# Altium PCB PCB_Break.pcbdoc
Units mil, origin at the board's own origin, x right, y up, seen from the top; angles counter-clockwise.
Board outline 1150 x 1023.62 mil, 2 copper layers (Top Layer, Bottom Layer); 20 components, 20 nets, 67 pads, 4 vias.
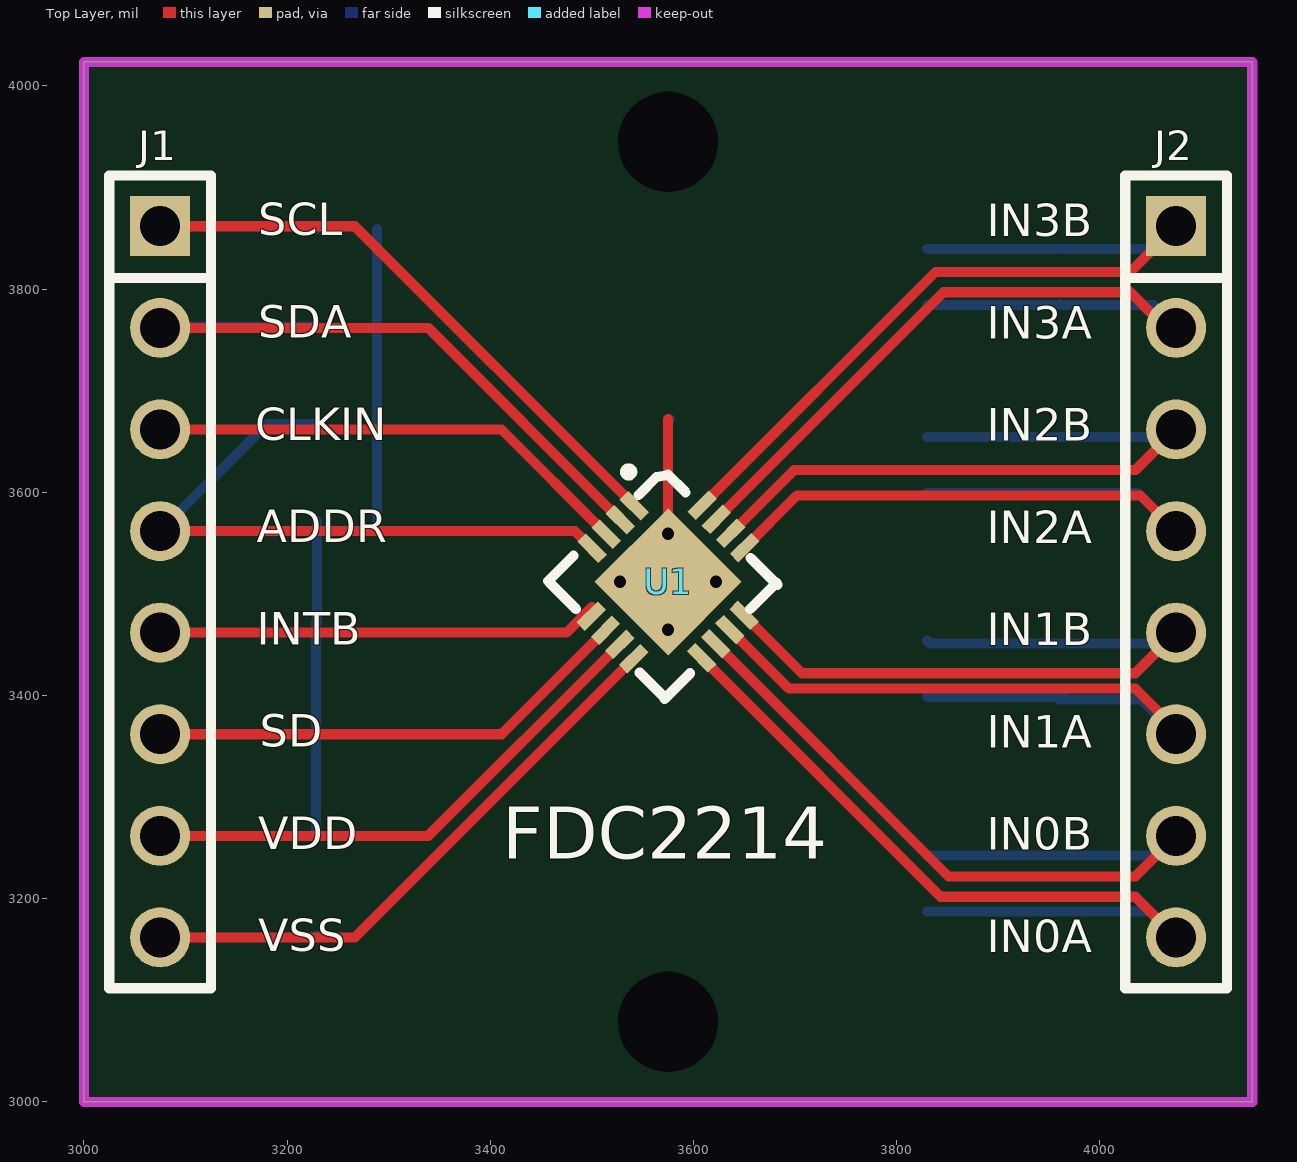
[diagram p0: Top Layer view]
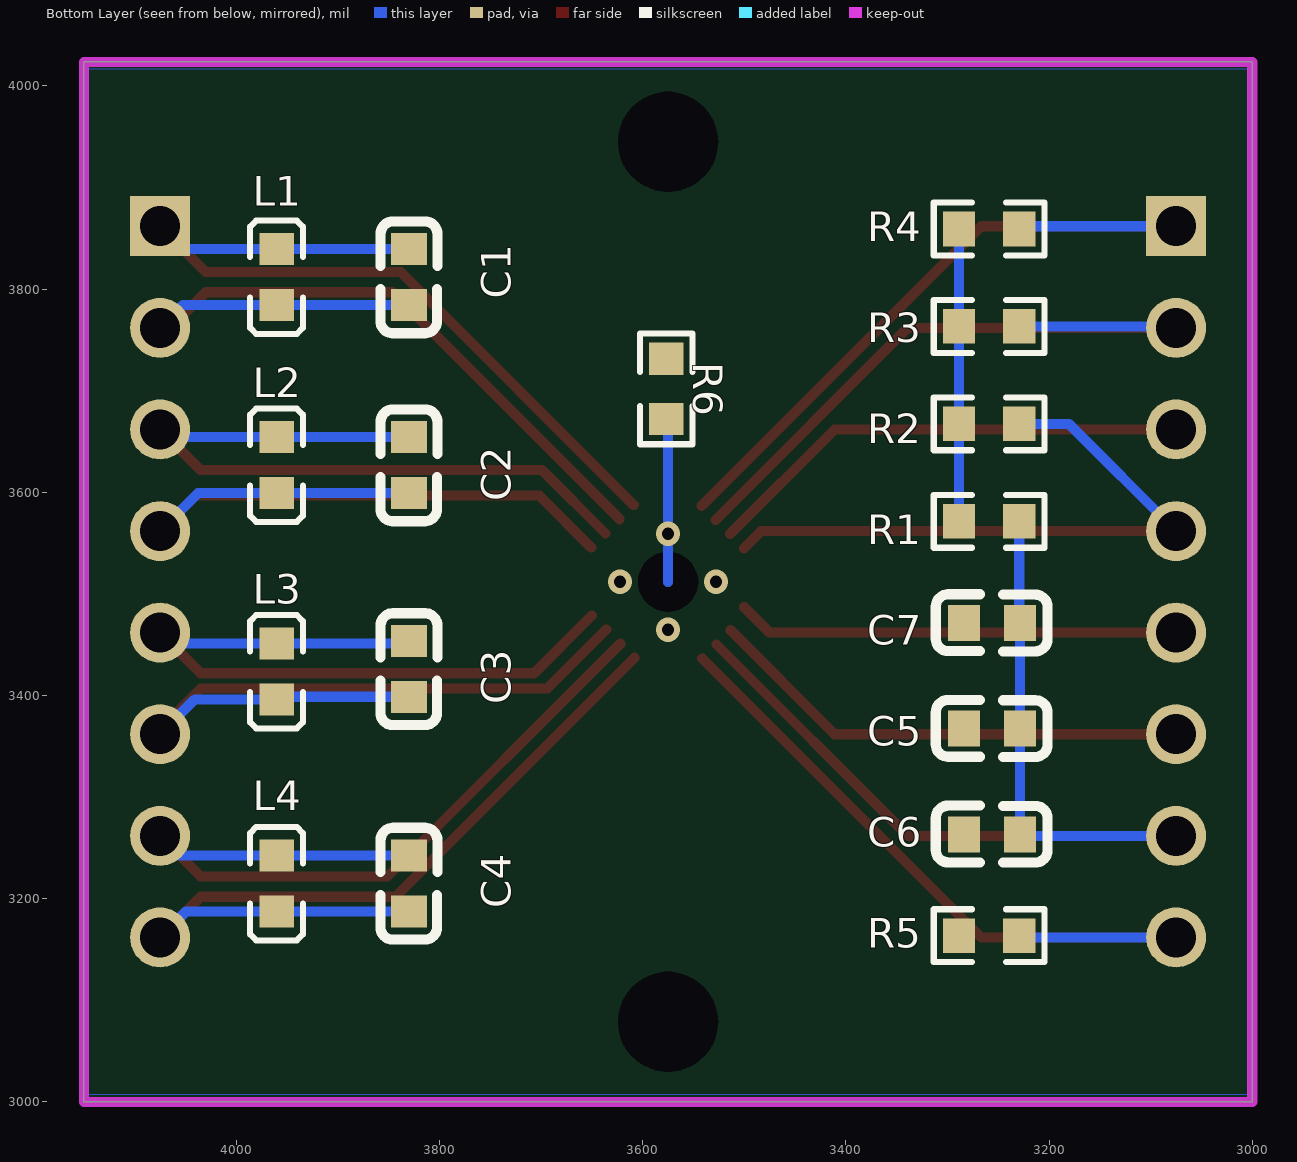
[diagram p1: Bottom Layer view, seen from below]

## Layer stack, top to bottom
Top Layer: signal copper (thickness not stored)
Dielectric: dielectric 12.6, FR-4, Dk 4.8
Bottom Layer: signal copper (thickness not stored)

## Board outline
3000,3000 4150,3000 4150,4023.62 3000,4023.62
cut-out: 3624.21,3944.88 ccw(c3575,3944.88) 3525.79,3944.88 ccw(c3575,3944.88)
cut-out: 3624.21,3078.74 ccw(c3575,3078.74) 3525.79,3078.74 ccw(c3575,3078.74)
cut-out: 3604.53,3511.81 ccw(c3575,3511.81) 3545.47,3511.81 ccw(c3575,3511.81)

## Components (designator, comment, footprint, x,y, rotation, side; value= is the part's Value field where it differs from the comment)
C1 "0603CG330J500NT" C0603 3830,3811.81 r90 bottom
C2 "0603CG330J500NT" C0603 3830,3626.81 r90 bottom
C3 "0603CG330J500NT" C0603 3830,3426.22 r90 bottom
C4 "0603CG330J500NT" C0603 3830,3215.03 r90 bottom
C5 "CL10A105KB8NNNC" C0603 3256.19,3263.38 r180 bottom
C6 "CC0603KRX7R9BB104" C0603 3256.19,3367.37 r180 bottom
C7 "0603B103K500NT" C0603 3256.19,3471.37 r180 bottom
J1 "PZ254V-11-08P" HDR-TH_8P-P2.54-V-M 3075,3511.81 r270 top
J2 "PZ254V-11-08P" HDR-TH_8P-P2.54-V-M 4075,3511.81 r270 top
L1 "SDFL1608T180KTF" L0603 3960,3811.81 r90 bottom
L2 "SDFL1608T180KTF" L0603 3960,3626.81 r90 bottom
L3 "SDFL1608T180KTF" L0603 3960,3423.66 r90 bottom
L4 "SDFL1608T180KTF" L0603 3960,3215.03 r90 bottom
R1 "RC0603FR-070RL" R0603 3258.99,3571.42 r0 bottom
R2 "0603WAF4701T5E" R0603 3258.99,3667.31 r0 bottom
R3 "0603WAF4701T5E" R0603 3258.99,3763.2 r0 bottom
R4 "0603WAF4701T5E" R0603 3258.99,3859.09 r0 bottom
R5 "RC0603FR-070RL" R0603 3258.99,3163.54 r180 bottom
R6 "RC0603FR-070RL" R0603 3576.78,3701.79 r90 bottom
U1 "FDC2214RGHT" WQFN-16_L4.1-W4.1-P0.50-LS4.1-BL 3575,3511.81 r225 top

## Footprints (in the part's own frame and the unit in brackets; to place one, negate y for a bottom-side part, rotate by r counter-clockwise, add the part's x,y. Pads: shape width x height; smd on the part's side, far side on the other; paste and mask are expansions set on the pad)
C0603 [mm]
  rect 0.8x0.9 smd paste+0 mask+0.051: 1(-0.7,0) 2(0.7,0)
  silkscreen extent -1.41,-0.71 1.39,0.72
HDR-TH_8P-P2.54-V-M [mm]
  rect 1.5x1.5 hole 1 paste+0 mask+0.051: 1(-8.89,0)
  round 1.5 hole 1 paste+0 mask+0.051: 2(-6.35,0) 3(-3.81,0) 4(-1.27,0) 5(1.27,0) 6(3.81,0) 7(6.35,0) 8(8.89,0)
  silkscreen extent -10.16,-1.27 10.16,1.27
L0603 [mm]
  rect 0.8x0.864 smd paste-100 mask+0.051: 1(-0.7,0) 2(0.7,0)
  silkscreen extent -1.42,-0.65 1.41,0.67
R0603 [mil]
  rect 31.75x34.02 smd paste-3937.01 mask+2: 1(-29.66,0) 2(29.66,0)
  silkscreen extent -55,-26 55,26
WQFN-16_L4.1-W4.1-P0.50-LS4.1-BL [mm]
  rect 0.3x0.75 smd paste+0 mask+0.051: 1(-0.749,-1.936) 2(-0.251,-1.936) 3(0.25,-1.936) 4(0.75,-1.936) 9(0.75,1.936) 10(0.25,1.936) 11(-0.251,1.936) 12(-0.751,1.936)
  rect 0.75x0.3 smd paste+0 mask+0.051: 5(1.962,-0.75) 6(1.962,-0.25) 7(1.962,0.251) 8(1.962,0.751) 13(-1.962,0.751) 14(-1.962,0.25) 15(-1.962,-0.25) 16(-1.962,-0.751)
  rect 2.6x2.6 smd paste+0 mask+0.051: 17(0,0)
  silkscreen extent -1.91,-2.73 2.13,2.01

## Via types
v1: diameter 24.02, hole 12.01, Top Layer to Bottom Layer, 4 vias

## Nets (pads, with @x,y where several pads share a name; then routed paths per layer and width w, separated by ;. In a path a pad name is that pad's centre, name@x,y a point inside that pad or via, vN(x,y) a via of type N, cw(c..) or ccw(c..) an arc to the next point about the centre after c; other vN are vias at no path point)
$1N1209: J1.1 R4.1 U1.1 | length 736.4
  Top Layer w10: J1.1 3266.68,3861.81 U1.1
  Bottom Layer w10: J1.1 3226.62,3861.81 R4.1
$1N1223: J1.2 R3.1 U1.2 | length 686.3
  Top Layer w10: J1.2 3338.97,3761.81 U1.2
  Bottom Layer w10: J1.2 3076.39,3763.2 R3.1
$1N1226: J1.3 U1.3 | length 481.8
  Top Layer w10: J1.3 3411.08,3661.81 U1.3
$1N1229: J1.4 R2.1 U1.4 | length 630.3
  Top Layer w10: J1.4 3483.25,3561.81 U1.4
  Bottom Layer w10: J1.4 3180.5,3667.31 R2.1
$1N1236: J1.5 U1.5 | length 435.4
  Top Layer w10: J1.5 3475,3461.81 U1.5@3500,3486.81
$1N1241: J1.6 U1.6 | length 480.8
  Top Layer w10: J1.6 3411.08,3361.81 U1.6
$1N1288: C5.2 C6.2 C7.2 J1.7 R1.1 U1.7 | length 993
  Top Layer w10: J1.7 3338.96,3261.81 U1.7
  Bottom Layer w10: J1.7 3227.07,3261.81 C5.2 C7.2 3229.33,3472.07 R1.1
$1N1320: J1.8 R5.2 U1.8 | length 735
  Top Layer w10: J1.8 3266.79,3161.81 U1.8
  Bottom Layer w10: J1.8 3227.61,3161.81 R5.2
$1N1516: R6.1 U1.17 | length 321.1
  Top Layer w10: U1.17 3575,3557.72 3575,3671.81
  Bottom Layer w10: 3575,3511.81 3575,3557.72 3575,3670.36 R6.1
  other v1: 3575,3464.57 3527.76,3511.81 3622.24,3511.81 3575,3559.06
$1N1527: C1.2 J2.1 L1.2 U1.16 | length 828.8
  Top Layer w10: U1.16 3838.21,3816.81 4029.48,3816.81 ; 4030,3816.81 J2.1
  Bottom Layer w10: C1.2 L1.2 ; L1.2@3965,3839.37 4052.55,3839.37 J2.1
$1N1567: C1.1 J2.2 L1.1 U1.15 | length 809.3
  Top Layer w10: U1.15 3846.08,3796.81 4030,3796.81 4065,3761.81 J2.2
  Bottom Layer w10: C1.1 3959.1,3784.25 L1.1@3960.19,3785.34 ; L1.1@3965,3784.26 4052.55,3784.26 J2.2
$1N1630: C2.2 J2.3 L2.2 U1.14 | length 728.9
  Top Layer w10: U1.14 3698.93,3621.81 4035,3621.81 J2.3
  Bottom Layer w10: C2.2 L2.2 4067.55,3654.37 J2.3
$1N1633: C2.1 J2.4 L2.1 U1.13 | length 720.7
  Top Layer w10: U1.13 3701.79,3596.81 4040,3596.81 J2.4
  Bottom Layer w10: C2.1 L2.1 4037.55,3599.26 J2.4
$1N1642: C3.2 J2.5 L3.2 U1.12 | length 715.8
  Top Layer w10: U1.12 3706.83,3421.81 4035,3421.81 J2.5
  Bottom Layer w10: C3.2 3832.56,3451.22 L3.2 4064.4,3451.22 J2.5
$1N1645: C3.1 J2.6 L3.1 U1.11 | length 750.1
  Top Layer w10: U1.11 3693.97,3406.81 4035,3406.81 4075,3366.81 J2.6
  Bottom Layer w10: C3.1 3962.51,3398.66 L3.1@3965.06,3396.11 ; L3.1 L3.1@3965.06,3396.11 ; J2.6 4040.71,3396.11 L3.1@3965.06,3396.11
$1N1664: C4.2 J2.7 L4.2 U1.10 | length 817.5
  Top Layer w10: U1.10 3851.11,3221.81 4035,3221.81 J2.7
  Bottom Layer w10: C4.2 L4.2 4055.78,3242.59 J2.7
$1N1669: C4.1 J2.8 L4.1 U1.9 | length 836.6
  Top Layer w10: U1.9 3843.25,3201.81 4035,3201.81 J2.8
  Bottom Layer w10: C4.1 L4.1 4049.33,3187.48 J2.8
GND: C5.1 C6.1 C7.1 R5.1 R6.2
VCC: R1.2 R2.2 R3.2 R4.2 | length 287.7
  Bottom Layer w10: R1.2 R4.2
"": 

## Polygon pours and split planes (outlines as drawn)
GND on Bottom Layer (solid, remove dead copper, pour order 0): 3005,3006.81 4145,3006.81 4145,4016.81 3005,4016.81

## Keep-outs
Board Outline Layer:
  the board outline again, w10

## Other copper
Bottom Layer:
  region net "": 3502.17,3511.81 3646.93,3511.81 3502.17,3511.81

## Silkscreen, mask and mechanical layers (free items; w line width, h text height)
Top Silkscreen Layer:
  text "SCL" at 3171.55,3852.74 h31.94
  text "IN3B" at 3888.48,3851.83 h31.94
  text "SDA" at 3171.55,3752.08 h31.94
  text "IN3A" at 3888.48,3751.17 h31.94
  text "CLKIN" at 3168.74,3651.42 h31.94
  text "IN2B" at 3888.48,3650.51 h31.94
  text "ADDR" at 3170.14,3550.76 h31.94
  text "IN2A" at 3888.48,3549.85 h31.94
  text "INTB" at 3170.14,3450.1 h31.94
  text "IN1B" at 3888.48,3449.2 h31.94
  text "SD" at 3172.95,3349.45 h31.94
  text "IN1A" at 3888.48,3348.54 h31.94
  text "VDD" at 3171.55,3248.79 h31.94
  text "IN0B" at 3888.48,3247.88 h31.94
  text "FDC2214" at 3411.66,3239.29 h51.1
  text "VSS" at 3171.55,3148.13 h31.94
  text "IN0A" at 3888.48,3147.22 h31.94
Mechanical Layer:
  circle w1 net "": c3575,3944.88 r49.21
  circle w1 net "": c3575,3078.74 r49.21
  circle w1 net "": c3575,3511.81 r29.53